# Altium PCB tcc_shield.PcbDoc
Units mil, origin at the board's own origin, x right, y up, seen from the top; angles counter-clockwise.
Board outline 3188.98 x 2086.61 mil, 2 copper layers (Top Layer, Bottom Layer); 6 components, 10 nets, 126 pads, 11 vias.
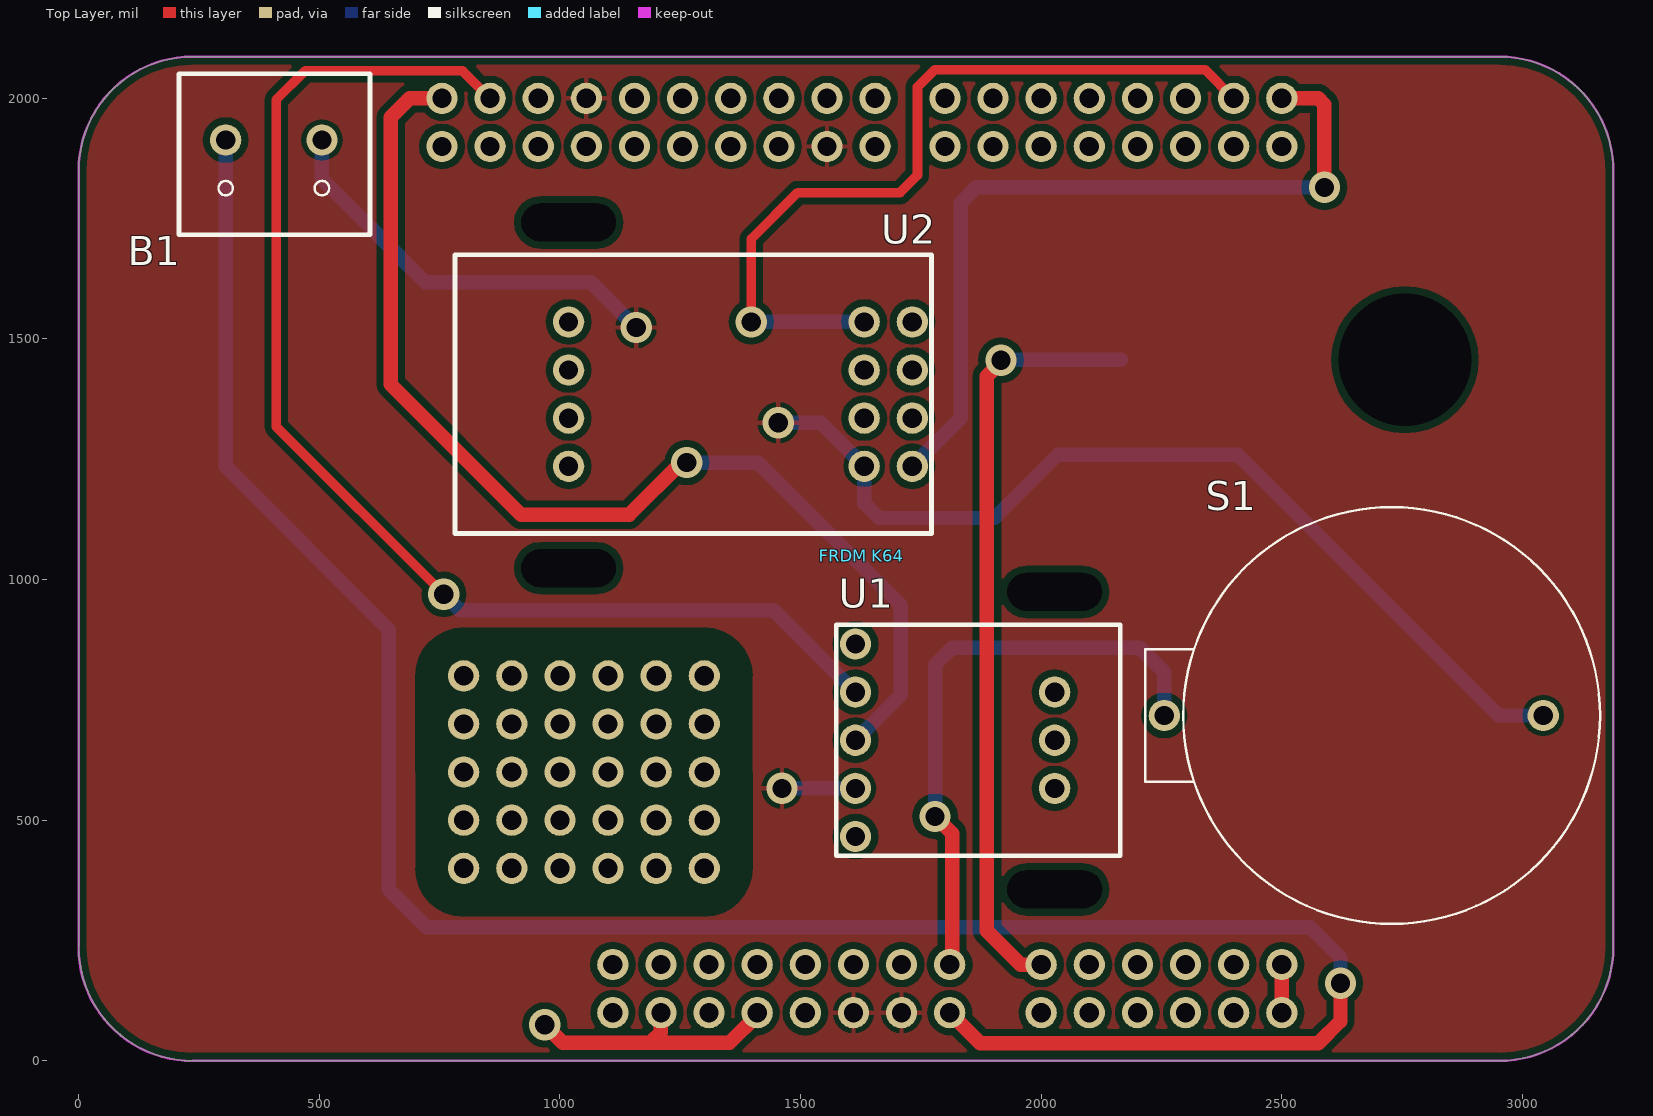
[diagram p0: Top Layer view]
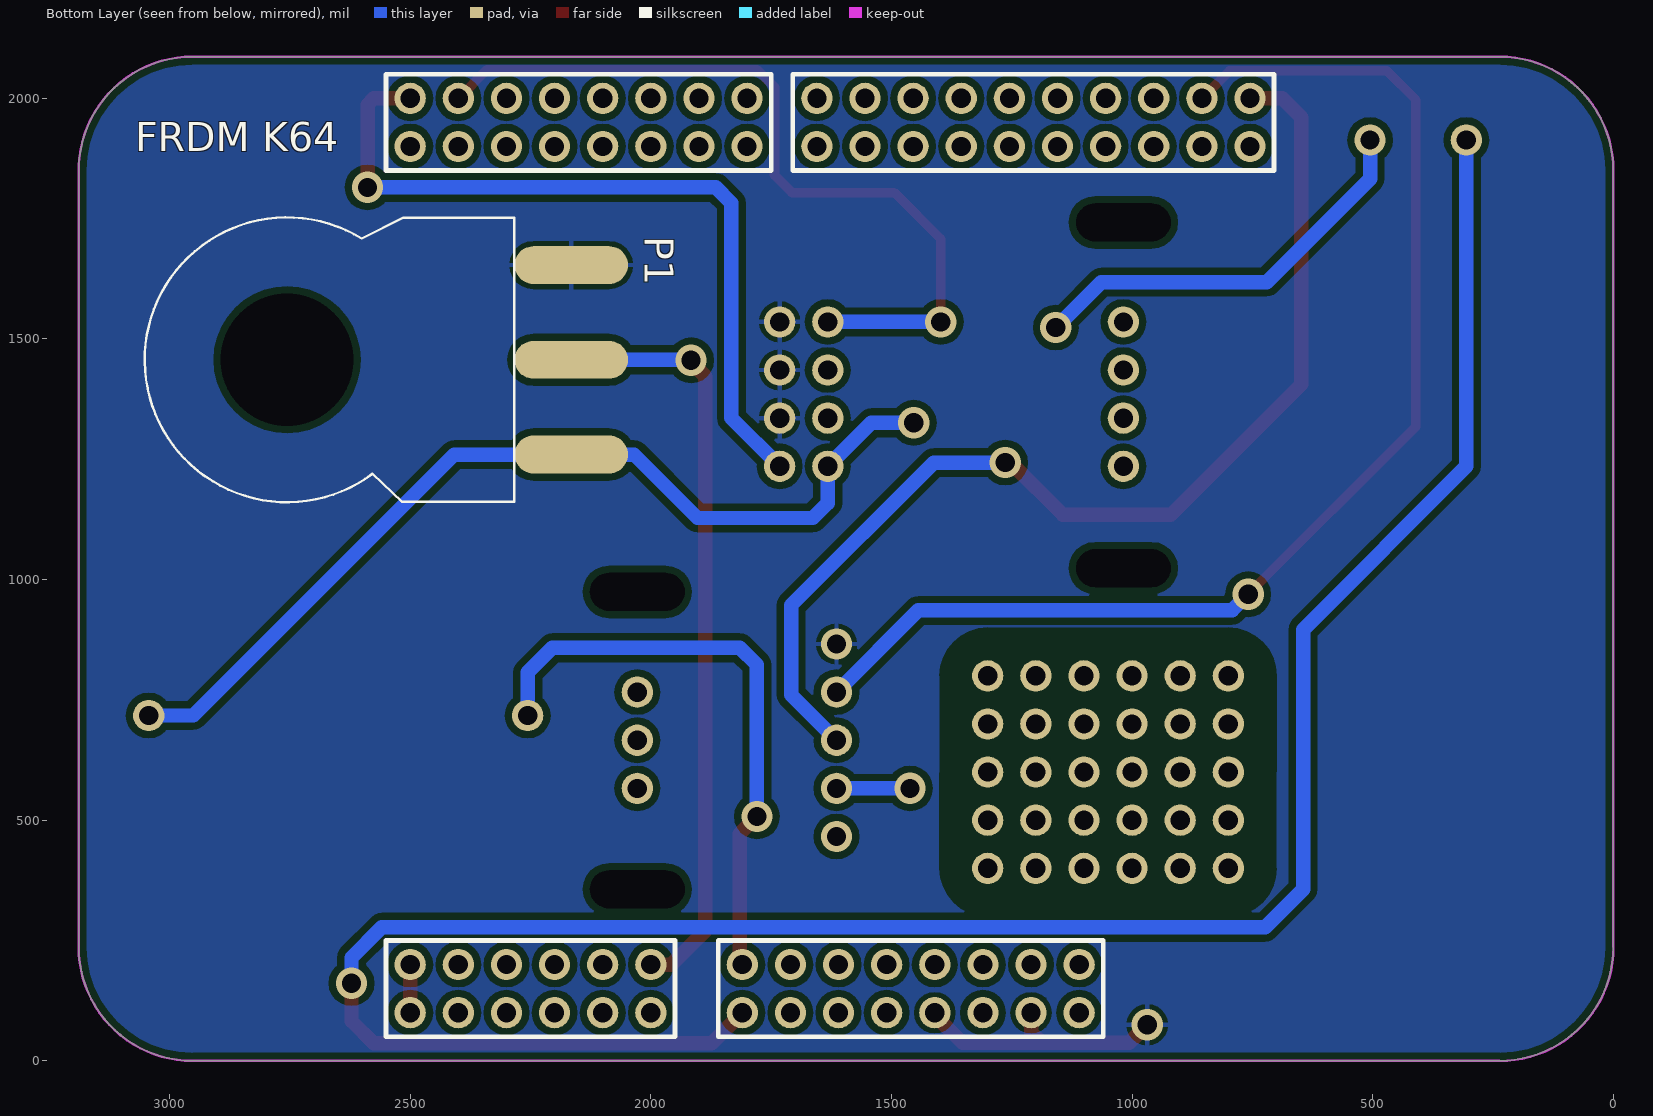
[diagram p1: Bottom Layer view, seen from below]

## Layer stack, top to bottom
Top Solder: solder mask 0.4, Solder Resist, Dk 3.5
Top Layer: signal copper 1.4
Dielectric 1: dielectric 12.6, FR-4, Dk 4.8
Bottom Layer: signal copper 1.4
Bottom Solder: solder mask 0.4, Solder Resist, Dk 3.5

## Board outline
472.44,2086.61 237,2086.61 ccw(c237,1849.61) 0,1849.61 0,1614.17 0,472.44 0,237 ccw(c237,237) 237,0 472.44,0 2716.54,0 2951.98,0 ccw(c2951.98,237) 3188.98,237 3188.98,472.44 3188.98,1614.17 3188.98,1849.61 ccw(c2951.98,1849.61) 2951.98,2086.61 2716.54,2086.61 472.44,2086.61

## Design rules (kind name [scope] priority, off if disabled: settings)
Clearance [All] p1: gap=14.5
HoleSize [All] p1: absolutevalues=TRUE maxlimit=393.7 minlimit=1 maxpercent=80.000 minpercent=20.000
PlaneConnect [All] p1: planeconnectstyle=Relief reliefexpansion=20 reliefentries=4 reliefconductorwidth=10 reliefairgap=39.37
PolygonConnect [All] p1: connectstyle=Relief reliefconductorwidth=10 reliefentries=4 polygonreliefangle="90 Angle" airgapwidth=10
RoutingVias [All] p1: holewidth=40 width=65 viastyle="Through Hole" minholewidth=40 minwidth=65 maxholewidth=40 maxwidth=65
SilkToBoardRegionClearance [All] p1 off:
SilkToSolderMaskClearance [IsPad] p1 off: minsilkscreentomaskgap=10 clearancetoexposedcopper=TRUE
SolderMaskExpansion [All] p1: expansion=4
Width [All] p1: maxlimit=30 minlimit=20 preferedwidth=30
25 further rules are at their usual default settings.

## Components (designator, comment, footprint, x,y, rotation, side; value= is the part's Value field where it differs from the comment)
B1 "Borne 2 vias" "Borne 2 Vias" 405.51,1913.39 r90 top
"FRDM K64" "FRDM K64 Headers" "FRDM K64" 0,0 r0 top
P1 "Potenciometro" Potenciometro 2165.35,1456.69 r180 bottom
S1 "CR2032 Holder" "CR2032 Holder" 2728.35,717.52 r0 top
U1 "BMP180 Breakout Board" "BPM180 Breakout Board" 1614.17,866.14 r180 top
U2 "ESP8266 Breakout Board" "ESP2866 Break Board" 1732.28,1535.43 r180 top

## Footprints (in the part's own frame and the unit in brackets; to place one, negate y for a bottom-side part, rotate by r counter-clockwise, add the part's x,y. Pads: shape width x height; smd on the part's side, far side on the other; paste and mask are expansions set on the pad)
"Borne 2 Vias" [mil]
  round 65 hole 40: GND(0,-100) VCC(0,100)
  silkscreen extent -197,-200 138,197
"BPM180 Breakout Board" [mil]
  round 65 hole 40: 3.3(0,0) GND(0,300) SCL(0,200) SDA(0,100) VCC(0,400)
  silkscreen extent -550,-40 40,440
"CR2032 Holder" [mil]
  round 65 hole 40: GND(314.96,0) VBAT(-472.44,0)
  silkscreen extent -512,-433 433,433
"ESP2866 Break Board" [mil]
  round 65 hole 40: 3.3V(0,0) CH_PD(0,200) GND(100,300) GPIO0(100,100) GPIO2(100,200) RST(0,100) RX(100,0) TX(0,300)
  silkscreen extent -40,-140 950,440
"FRDM K64" [mil]
  round 65 hole 40: J1_1(2500,1900) J1_2(2500,2000) J1_3(2400,1900) J1_4(2400,2000) J1_5(2300,1900) J1_6(2300,2000) J1_7(2200,1900) J1_8(2200,2000) J1_9(2100,1900) J1_10(2100,2000) J1_11(2000,1900) J1_12(2000,2000) J1_13(1900,1900) J1_14(1900,2000) J1_15(1800,1900) J1_16(1800,2000) J2_1(1655,1900) J2_2(1655,2000) J2_3(1555,1900) J2_4(1555,2000) J2_5(1455,1900) J2_6(1455,2000) J2_7(1355,1900) J2_8(1355,2000) J2_9(1255,1900) J2_10(1255,2000) J2_11(1155,1900) J2_12(1155,2000) J2_13(1055,1900) J2_14(1055,2000) J2_15(955,1900) J2_16(955,2000) J2_17(855,1900) J2_18(855,2000) J2_19(755,1900) J2_20(755,2000) J3_1(1110,200) J3_2(1110,100) J3_3(1210,200) J3_4(1210,100) J3_5(1310,200) J3_6(1310,100) J3_7(1410,200) J3_8(1410,100) J3_9(1510,200) J3_10(1510,100) J3_11(1610,200) J3_12(1610,100) J3_13(1710,200) J3_14(1710,100) J3_15(1810,200) J3_16(1810,100) J4_1(2000,200) J4_2(2000,100) J4_3(2100,200) J4_4(2100,100) J4_5(2200,200) J4_6(2200,100) J4_7(2300,200) J4_8(2300,100) J4_9(2400,200) J4_10(2400,100) J4_11(2500,200) J4_12(2500,100)
Potenciometro [mm]
  round 3 hole 7 unplated: 3(-15,0)
  oval 6x2 smd: pot_1(0,-5) pot_2(0,0) pot_3(0,5)
  silkscreen extent -22.52,-7.52 -3,7.52

## Free pads (board coordinates)
  round 65 hole 40 unplated: 0(1018.11,1435.43) 1(1018.11,1335.43) 2(1018.11,1235.43) 6(900,800) 7(900,700) 8(900,600) 9(900,500) 10(900,400) 11(2028.15,766.14) 12(2028.15,666.14) 13(1000,400) 13(2028.15,566.14) 14(1000,500) 15(1000,600) 15(1018.11,1535.43) 16(1000,700) 17(1000,800) 18(1100,800) 19(1100,700) 20(1100,600) 21(1100,500) 23(1100,400) 24(1200,400) 25(1200,500) 26(1200,600) 27(1200,700) 28(1200,800) 29(1300,800) 30(1300,700) 31(1300,600) 32(1300,500) 33(1300,400) 38(800,800) 39(800,700) 40(800,600) 42(800,500) 43(800,400)
  round 0 hole 78.74 slot 196.85 at 0 deg unplated: MH_1(1018.11,1742.13) MH_2(1018.11,1023.62) MH_3(2028.15,974.41) MH_4(2028.15,356.3)

## Via types
v1: diameter 65, hole 40, Top Layer to Bottom Layer, 11 vias

## Nets (pads, with @x,y where several pads share a name; then routed paths per layer and width w, separated by ;. In a path a pad name is that pad's centre, name@x,y a point inside that pad or via, vN(x,y) a via of type N, cw(c..) or ccw(c..) an arc to the next point about the centre after c; other vN are vias at no path point)
+3V3: "FRDM K64.J3_4" "FRDM K64.J3_8" P1.pot_3 U1.3.3 U2.3.3V U2.CH_PD U2.RST | length 557.6
  Top Layer w30: v1(968.5,74.8) 1005.91,37.4 1187.99,37.4 ; 1210,100 1210,59.41 1187.99,37.4 ; 1410,100 1410,95 1352.4,37.4 1187.99,37.4
"+5 EXT": "FRDM K64.J3_16" B1.VCC | length 4723.1
  Top Layer w30: 1810,100 1873.58,36.42 2575.79,36.42 2622.05,82.68 v1(2622.05,161.42)
  Bottom Layer w30: B1.VCC 305.51,1235.24 644.68,896.06 644.68,356.3 723.43,277.56 2559.06,277.56 2622.05,214.57 v1(2622.05,161.42)
AN1: "FRDM K64.J4_1" P1.pot_2 | length 1588.7
  Top Layer w30: v1(1916.34,1455.71) 1916.34,1451.77 1887.3,1422.74 1887.3,270.18 1957.48,200 2000,200
  Bottom Layer w30: v1(1916.34,1455.71) 1917.32,1456.69 P1.pot_2
GND: "FRDM K64.J2_3" "FRDM K64.J2_14" "FRDM K64.J3_12" "FRDM K64.J3_14" B1.GND P1.pot_1 S1.GND U1.GND U2.GND | length 3009.5
  Bottom Layer w30: B1.GND 505.51,1833.07 720.47,1618.11 1063.98,1618.11 v1(1158.46,1523.62) ; v1(1453.74,1325.79) 1541.93,1325.79 U2.GND 1632.28,1159.06 1663.39,1127.95 1903.09,1127.95 2034.98,1259.84 P1.pot_1 2408.46,1259.84 2950.79,717.52 S1.GND ; v1(1461.61,566.14) U1.GND
I2C0_SCL: "FRDM K64.J2_20" U1.SCL | length 2337.4
  Top Layer w30: 755,2000 687.99,2000 648.62,1960.63 648.62,1405.51 919.29,1134.84 1143.7,1134.84 1251.97,1243.11 v1(1263.78,1243.11)
  Bottom Layer w30: v1(1263.78,1243.11) 1412.4,1243.11 1708.66,946.85 1708.66,760.63 U1.SCL
I2C0_SDA: "FRDM K64.J2_18" U1.SDA | length 2604.5
  Top Layer w20: v1(758.86,969.49) 410.43,1317.91 410.43,1997.05 470.47,2057.09 797.91,2057.09 855,2000
  Bottom Layer w30: v1(758.86,969.49) 792.32,936.02 1444.29,936.02 U1.SDA
LOOPBACK: "FRDM K64.J4_11" "FRDM K64.J4_12" | length 100
  Top Layer w30: 2500,100 2500,200
UART3_RX: "FRDM K64.J1_2" U2.TX | length 1624.1
  Top Layer w30: 2500,2000 2575.79,2000 2588.58,1987.2 v1(2588.58,1814.96)
  Bottom Layer w30: U2.TX 1832.68,1335.83 1832.68,1782.48 1865.16,1814.96 v1(2588.58,1814.96)
UART3_TX: "FRDM K64.J1_4" U2.RX | length 1687
  Top Layer w20: v1(1397.64,1535.43) 1397.64,1707.68 1494.09,1804.13 1706.69,1804.13 1743,1840.44 1743,2023.61 1779,2059.61 2340.39,2059.61 2400,2000
  Bottom Layer w30: v1(1397.64,1535.43) U2.RX
VBAT: "FRDM K64.J3_15" S1.VBAT | length 1241.4
  Top Layer w30: v1(1779.53,507.87) 1815,472.4 1815,205 1810,200
  Bottom Layer w30: v1(1779.53,507.87) 1779.53,822.83 1814.96,858.27 2204.72,858.27 2255.91,807.09 S1.VBAT
pads on no net: "FRDM K64.J1_1" "FRDM K64.J1_3" "FRDM K64.J1_5" "FRDM K64.J1_6" "FRDM K64.J1_7" "FRDM K64.J1_8" "FRDM K64.J1_9" "FRDM K64.J1_10" "FRDM K64.J1_11" "FRDM K64.J1_12" "FRDM K64.J1_13" "FRDM K64.J1_14" "FRDM K64.J1_15" "FRDM K64.J1_16" "FRDM K64.J2_1" "FRDM K64.J2_2" "FRDM K64.J2_4" "FRDM K64.J2_5" "FRDM K64.J2_6" "FRDM K64.J2_7" "FRDM K64.J2_8" "FRDM K64.J2_9" "FRDM K64.J2_10" "FRDM K64.J2_11" "FRDM K64.J2_12" "FRDM K64.J2_13" "FRDM K64.J2_15" "FRDM K64.J2_16" "FRDM K64.J2_17" "FRDM K64.J2_19" "FRDM K64.J3_1" "FRDM K64.J3_2" "FRDM K64.J3_3" "FRDM K64.J3_5" "FRDM K64.J3_6" "FRDM K64.J3_7" "FRDM K64.J3_9" "FRDM K64.J3_10" "FRDM K64.J3_11" "FRDM K64.J3_13" "FRDM K64.J4_2" "FRDM K64.J4_3" "FRDM K64.J4_4" "FRDM K64.J4_5" "FRDM K64.J4_6" "FRDM K64.J4_7" "FRDM K64.J4_8" "FRDM K64.J4_9" "FRDM K64.J4_10" P1.3 U1.VCC U2.GPIO0 U2.GPIO2

## Polygon pours and split planes (outlines as drawn)
+3V3 on Bottom Layer "Bottom Layer-+3V3" (solid, pour order 12): 0,1712.6 0,1850.61 cw(c236,1850.61) 236,2086.61 393.7,2086.61 2834.26,2086.61 2952.98,2086.61 cw(c2952.98,1850.61) 3188.98,1850.61 3188.98,1830.71 3188.98,374.02 3188.98,236 cw(c2952.98,236) 2952.98,0 2791.34,0 314.96,0 236,0 cw(c236,236) 0,236 0,295.28 0,1862.9
GND on Top Layer "Top Layer-GND" (solid, pour order 14): 0,1692.91 0,1850.8 cw(c236,1850.8) 236,2086.8 354.72,2086.8 2893.7,2086.8 2893.7,2086.61 2952.98,2086.61 cw(c2952.98,1850.61) 3188.98,1850.61 3188.98,1771.65 3188.98,275.59 3188.98,236 cw(c2952.98,236) 2952.98,0 2897.64,0 314.96,0 236,0 cw(c236,236) 0,236 0,314.96

## Keep-outs
Keep-Out Layer:
  lines w5: -0.29,236.22 ccw(c236.22,236.22) 237,-0.29 ; -0.06,1850.39 cw(c236.22,1850.39) 236.22,2086.67 ; 0,237 0,944.88 0,1850.39 ; 237,0 2951.98,0 ; 237,2086.61 2951.98,2086.61 cw(c2952.76,1850.39) 3188.95,1846.46 ; 2952.79,-0.05 ccw(c2952.79,236.13) 3188.98,236.13 3188.98,1846.46

## Other copper
Top Layer:
  pour cut-out: 1595.76,1257.65 1595.76,1256.87 1669.41,1256.87 1669.41,1214 1595.16,1214 1595.16,1256.87
  pour cut-out: 3013,746.06 3073.62,746.06 3073.62,685.44 3013,685.44
  pour cut-out: 1583.86,596.45 1644.48,596.45 1644.48,535.83 1583.86,535.83
  pour cut-out: 475.2,1943.7 535.82,1943.7 535.82,1883.07 475.2,1883.07
  pour cut-out: 800,900 1300,900 cw(c1300,800) 1400,800 1400,400 cw(c1300,400) 1300,300 800,300 cw(c800,400) 700,400 700,800 cw(c800,800)
Bottom Layer:
  pour cut-out: 1178.15,131.17 1178.15,69.62 1239.18,69.62 1239.18,130.94
  pour cut-out: 1380.52,130.31 1380.52,69.69 1441.14,69.69 1441.14,130.31
  pour cut-out: 1300,900 cw(c1300,800) 1400,800 1400,400 cw(c1300,400) 1300,300 800,300 cw(c800,400) 700,400 700,800 cw(c800,800) 800,900